# EAGLE board buzzer (EAGLE 9.5.2)
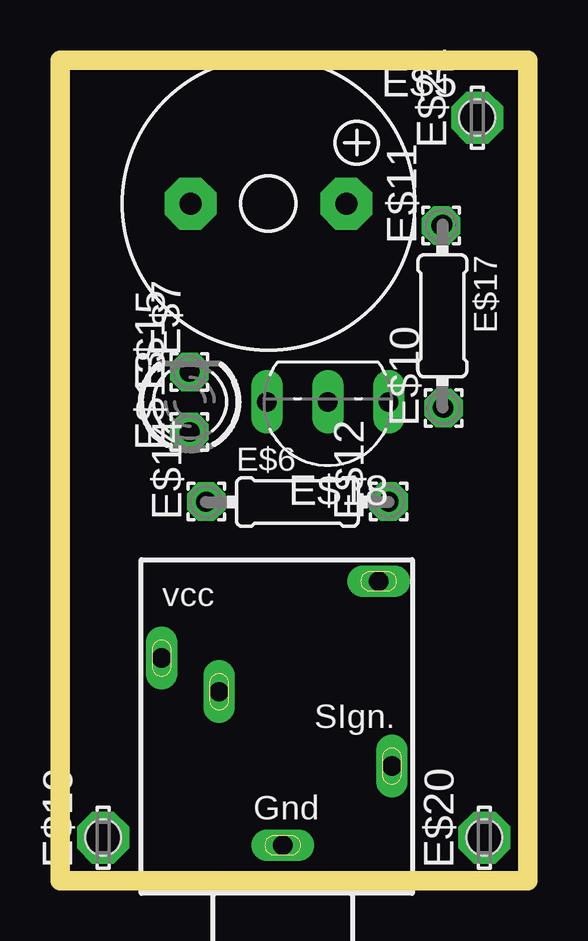
[diagram p0: board, top side]
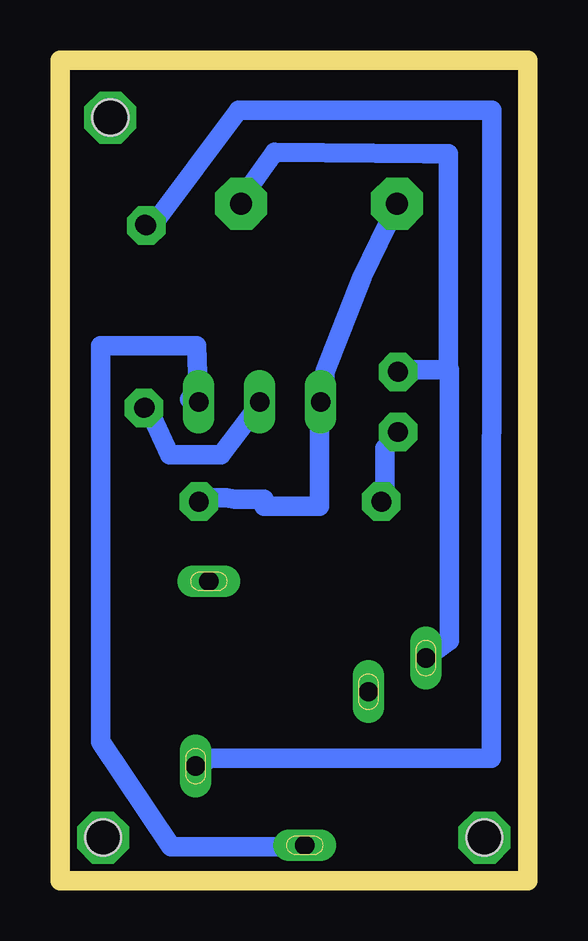
[diagram p1: board, bottom side, seen from below]

Size 19.5 x 34.2 mm. Coordinates in mm from the lower left corner, seen from the top.
Outline: 19.5,0 0,0 0,34.2 19.5,34.2 19.5,0
Copper layers (1*16): Top 0.035mm / dielectric 1.5mm / Bottom 0.035mm
Design rules "default": minimum track width 10mil, minimum drill 24mil, track to track 8mil, track to pad 8mil, pad to pad 8mil, via to via 8mil, smd to smd 8mil, copper to edge 40mil, drill to drill 8mil, minimum pad ring 10mil, minimum via ring 8mil, stop-mask expansion 4mil, vias tented up to drill 0mil, thermal gap 10mil
Holes 1.5 mm at 1.8,1.8 17.4,31.8 17.7,1.8

## Footprints (pad centres in the part's own frame; a part is rotated, then mirrored left to right if it is on the bottom)
1503_09 = drill 0.8 pad 1.2 long: 1 0,-2.1; 2 -4.55,-5.4; 3 5.05,-9.9; 4 -4,-13.1; 5 2.65,-8.5
F/QMX = drill 0.914 pad 2.159 octagon: + 3.251,0; - -3.251,0
0204/7 = drill 0.813 octagon: 1 -3.81,0; 2 3.81,0
LED3MM = drill 0.813 octagon: A -1.27,0; K 1.27,0
1,6/0,8 = drill 0.813 pad 1.6 octagon: 1 0,0
TO92- = drill 0.813 long: 1 2.54,0; 2 0,0; 3 -2.54,0
LSP11 = drill 1.118 pad 2.159 octagon: MP 0,0

## Placement (x,y rotation side)
E$2  [1503_09]  9.29,-0.62 180 top
E$5  BUZZER  [F/QMX]  8.7,28.22 0 top
E$6  220  [0204/7]  9.9,15.78 0 top
E$7  led  [LED3MM]  5.42,19.96 90 top
E$10  [1,6/0,8]  16,19.7 90 top
E$11  [1,6/0,8]  15.9,27.3 90 top
E$12  [1,6/0,8]  13.7,15.8 90 top
E$13  [1,6/0,8]  5.4,18.7 90 top
E$14  [1,6/0,8]  6.1,15.8 90 top
E$15  [1,6/0,8]  5.4,21.2 90 top
E$17  180  [0204/7]  15.95,23.54 270 top
E$18  2n5551  [TO92-]  11.17,19.96 180 top
E$19  [LSP11]  1.8,1.8 90 top
E$20  [LSP11]  17.7,1.8 90 top
E$21  [LSP11]  17.4,31.8 90 top

## Library data of the parts
E$2 = con-lumberg
E$5 = buzzer
E$6 E$17 = eagle-ltspice
E$7 = led
E$10-E$15 = wirepad
E$18 = transistor-fet
E$19-E$21 = solpad

## Nets
S$2: E$2.2 E$17.1
S$7: E$17.2 E$18.2
S$8: E$5.- E$6.2 E$18.1
S$10: E$2.3 E$5.+ E$7.K
S$11: E$2.1 E$18.3
S$12: E$6.1 E$7.A

## Tracks (layer width: path | path; a pad name or v marks a point on that pad's centre or on a via)
S$2
  Bottom 0.813: E$2.2 13.2,5.1 1.5,5.1 1.48,32.1 12.05,32.1 15.64,27.32 E$17.1
S$7
  Bottom 0.813: E$17.2 15.77,19.62 14.93,17.74 12.77,17.74 11.2,19.84 E$18.2
S$8
  Bottom 0.813: E$6.2 13.48,15.96 12.57,15.96 12.2,15.9 11,15.9 11,15.6 8.69,15.6 8.69,19.84 E$18.1 8.46,20.07 8.46,21.22 6.88,25.19 5.48,28.07 E$5.-
S$10
  Bottom 0.813: 3.26,21.3 3.26,10.01 E$2.3 | E$7.K 5.8,21.3 3.3,21.3 3.3,30.3 4.3,30.3 10.56,30.36 11.83,28.59 E$5.+
S$11
  Bottom 0.813: 14.08,20.07 E$18.3 13.8,22.3 17.8,22.3 17.8,5.8 14.87,1.42 9.29,1.42 E$2.1
S$12
  Bottom 0.813: E$6.1 5.94,15.96 5.94,18.02 5.48,18.47 E$7.A

## Text on the board
tPlace: vcc | SIgn. | Gnd
tTest: V | G | V | S
bTest: S | G